# EAGLE board elasticNode (EAGLE 9.4.2), part 1 of 2
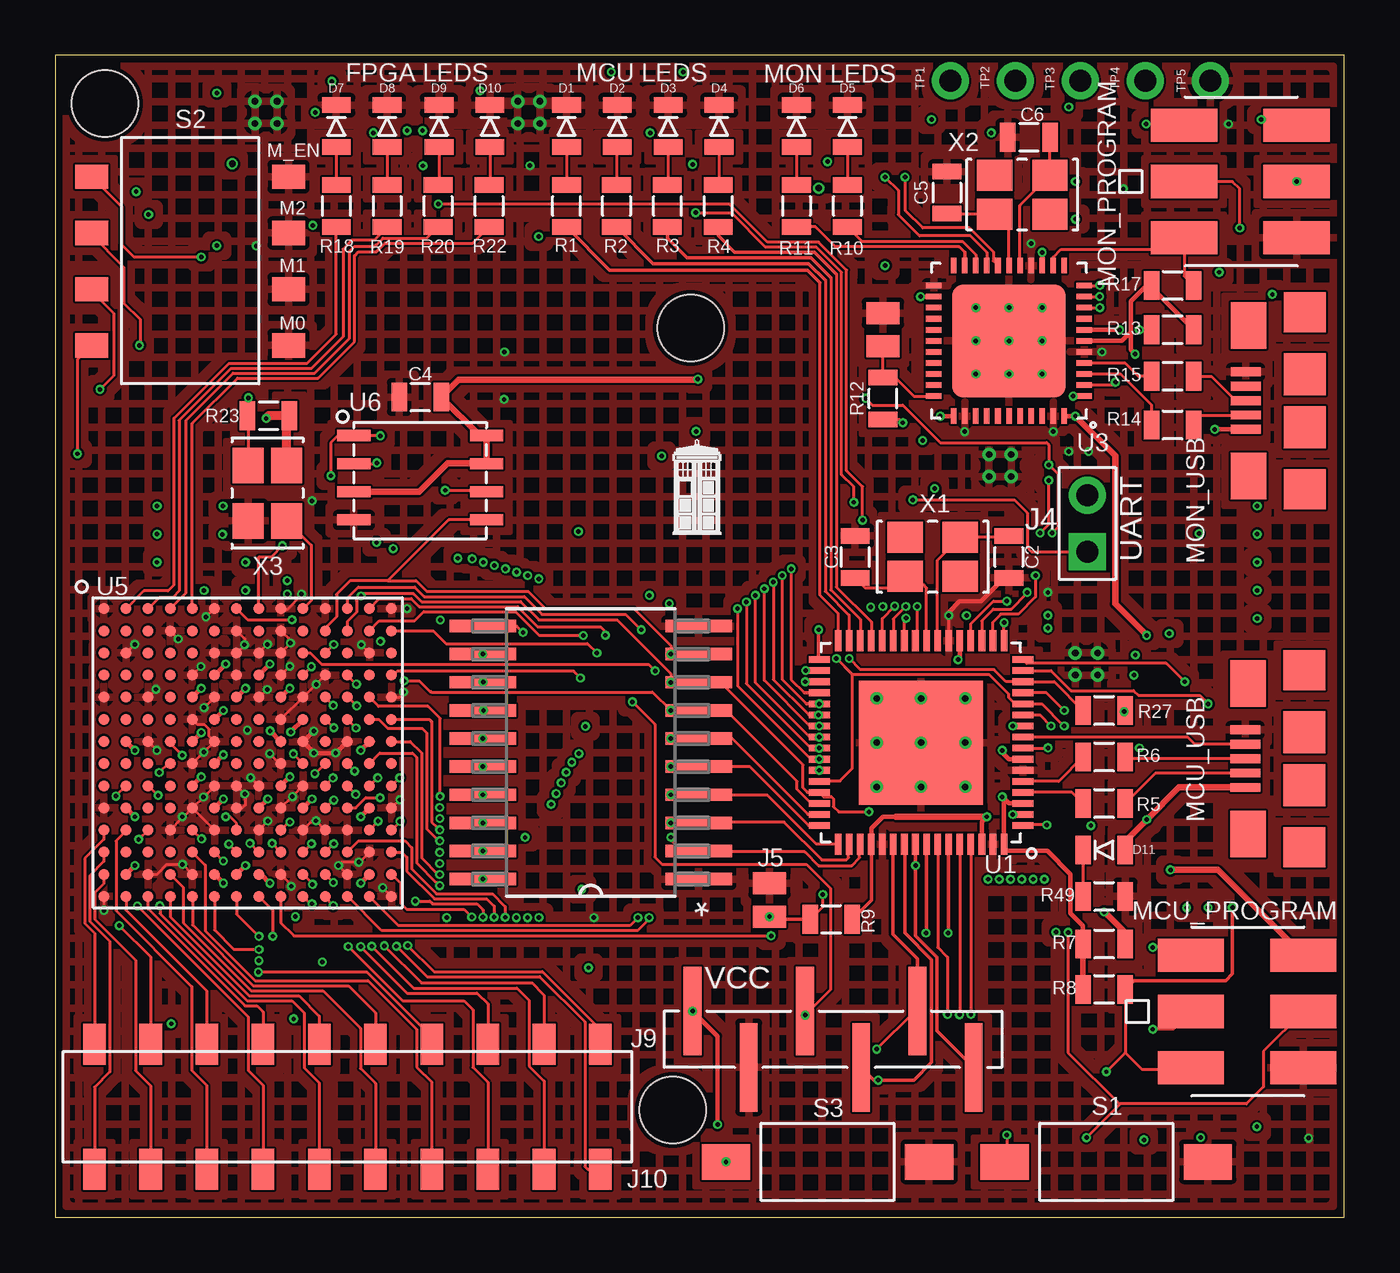
[diagram p0: board, top side]
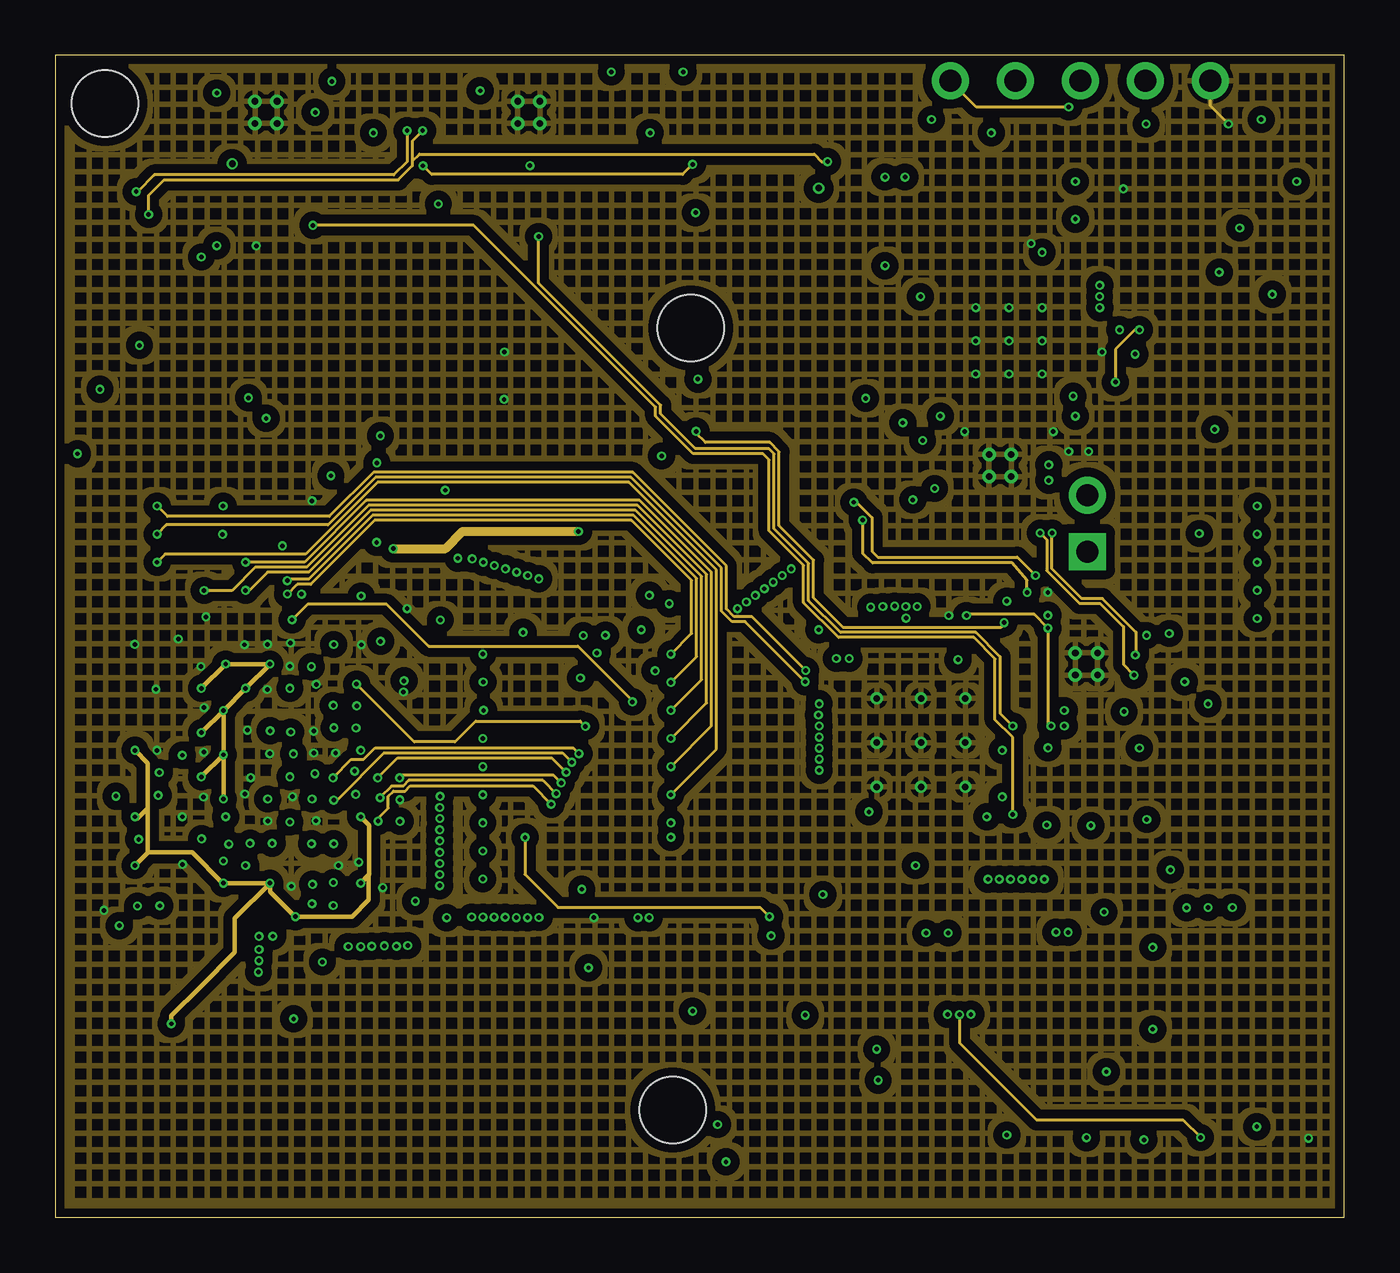
[diagram p1: board, inner layer GroundPlane]
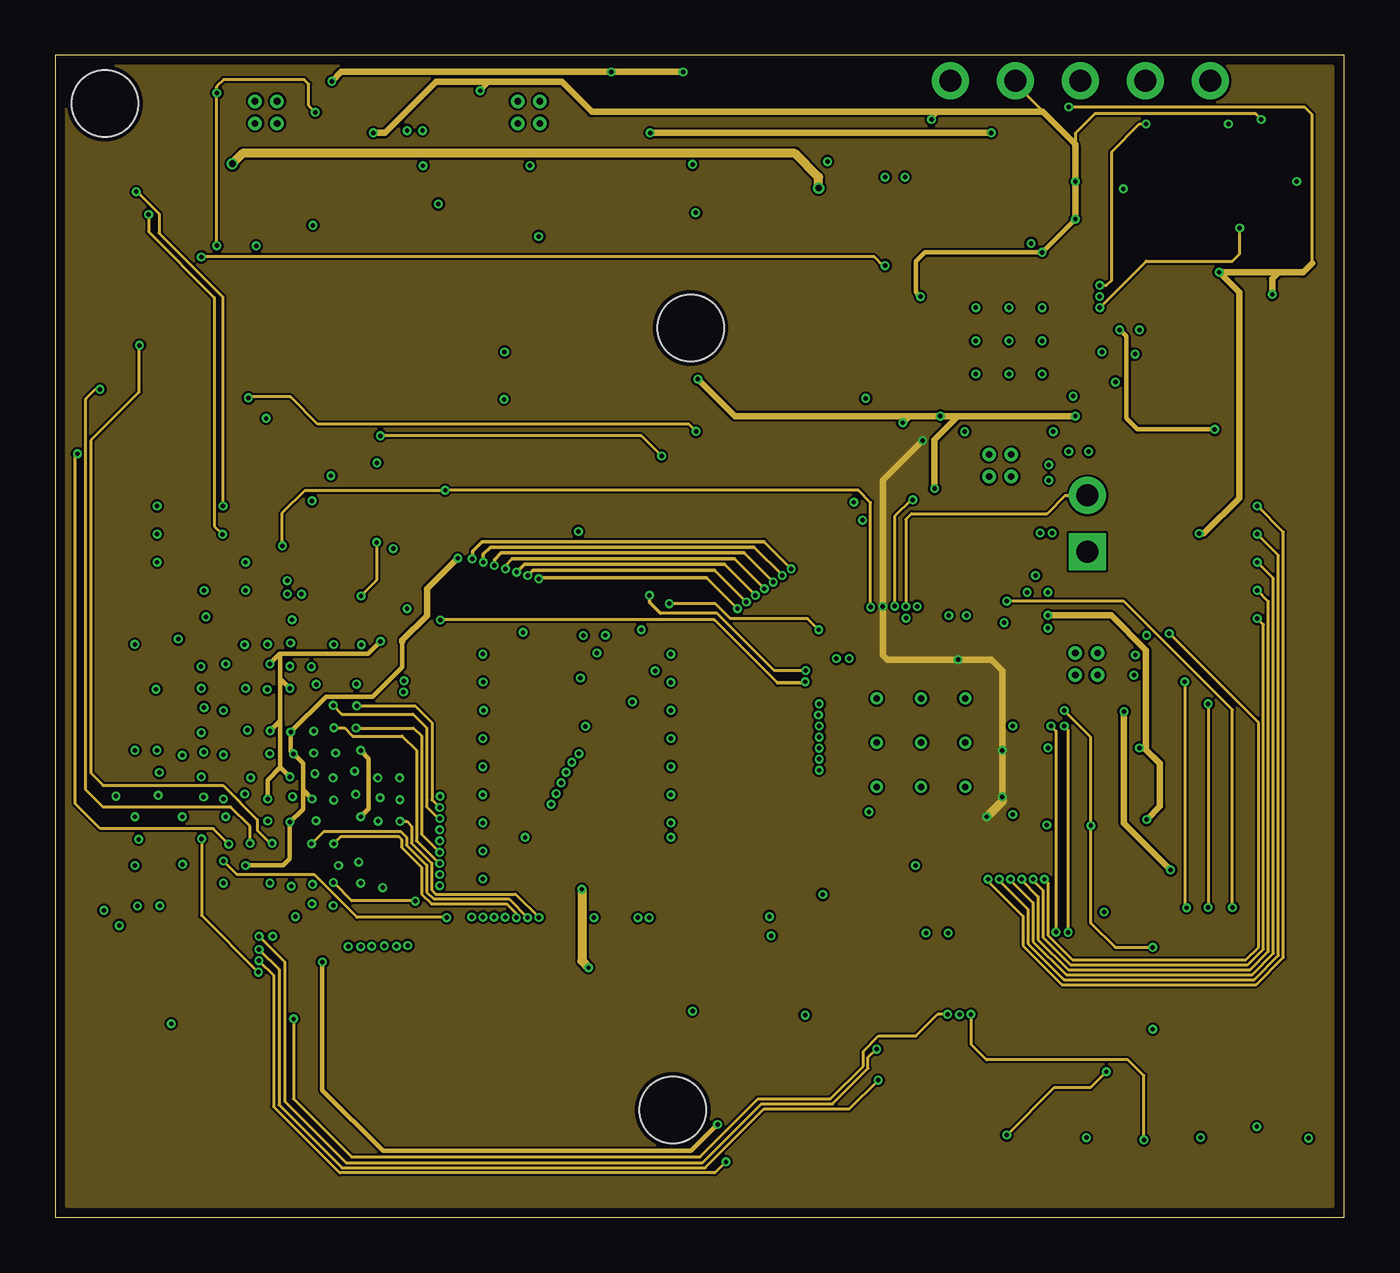
[diagram p2: board, inner layer PowerPlane]
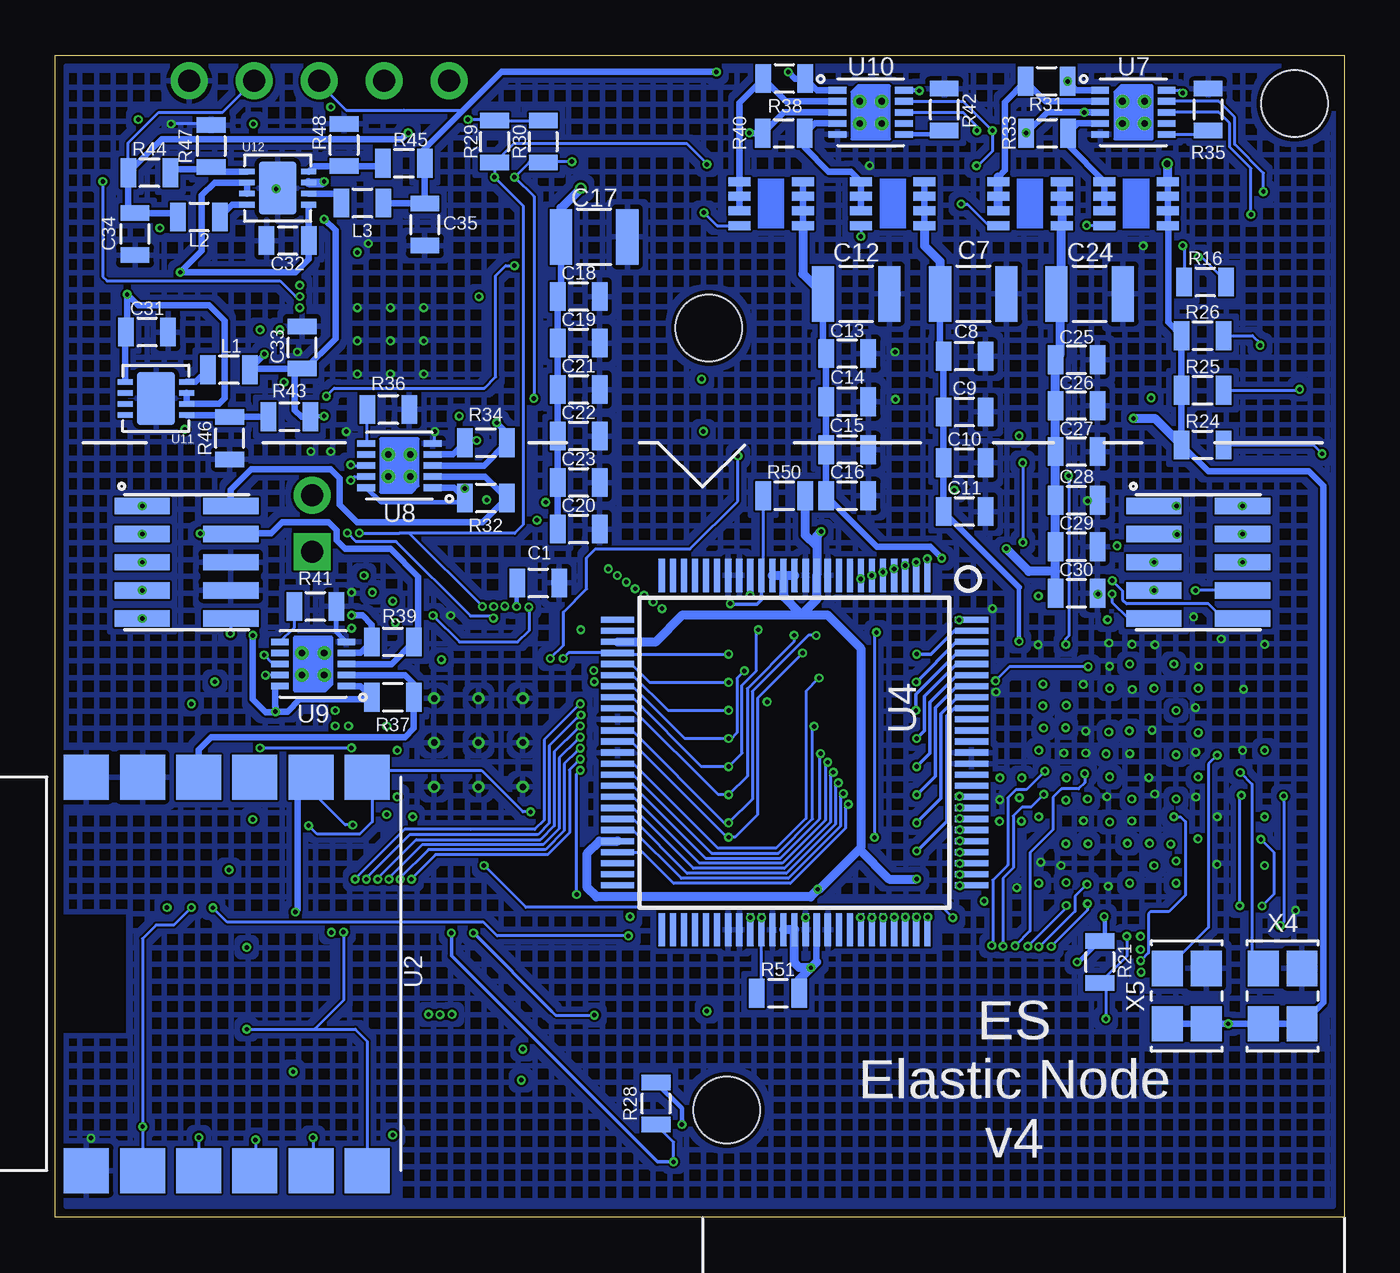
[diagram p3: board, bottom side, seen from below]

Size 58.25 x 52.5 mm. Coordinates in mm from the lower left corner, seen from the top.
Outline: 0,0 58.25,0 58.25,52.5 0,52.5 0,0
Copper layers (1+2*3+16): Top 0.018mm / dielectric 0.36mm / GroundPlane 0.035mm / dielectric 0.71mm / PowerPlane 0.035mm / dielectric 0.36mm / Bottom 0.018mm
Design rules "Multi-CB_4L_100Êm-Tracks_OL35Êm-IL35Êm": minimum track width 0.1mm, minimum drill 0.2mm, track to track 0.1mm, track to pad 0.1mm, pad to pad 0.1mm, via to via 0.1mm, smd to smd 0mil, copper to edge 0.2mm, drill to drill 0.2mm, minimum pad ring 0.125mm, minimum via ring 0.1mm, stop-mask expansion 2mil, vias tented up to drill 0.45mm, thermal gap 0.2mm
Holes 3 mm at 28.71,40.18 27.91,4.85 2.24,50.32

## Footprints (pad centres in the part's own frame; a part is rotated, then mirrored left to right if it is on the bottom)
0805 = smd 0.7 x 1.3: 1 -0.95,0; 2 0.95,0
1210 = smd 1 x 2.5: 1 -1.5,0; 2 1.5,0
5X2_HEADER_SMT_1.27 = smd 0.74 x 2.5: 1 -2.54,-2; 2 -1.27,-2; 3 0,-2; 4 1.27,-2; 5 2.54,-2; 6 2.54,2; 7 1.27,2; 8 0,2; 9 -1.27,2; 10 -2.54,2
ICSP_SMT = smd 1.5 x 3: 1 -2.54,-2.58; 2 -2.54,2.5; 3 0,-2.58; 4 0,2.5; 5 2.54,-2.58; 6 2.54,2.5
2X1_HEADER = drill 1 pad 1.676 square: 1 0,1.27 | drill 1 pad 1.676: 3 0,-1.27
JUMPER_SMT = smd 1 x 1.5: 1 -0.75,0; 2 0.75,0
USB_MICRO_B_SMT = smd 0.4 x 1.35: 1 -1.3,0; 2 -0.65,0; 3 0,0; 4 0.65,0; 5 1.3,0 | smd 2.1 x 1.6: CASE_1 -3.4,-0.125; CASE_2 3.4,-0.125 | smd 1.8 x 1.9: CASE_3 -4,-2.675; CASE_6 4,-2.675 | smd 1.9 x 1.9: CASE_4 -1.2,-2.675; CASE_5 1.2,-2.675
6X1_JTAG = smd 0.8 x 4: 1 -6.35,1.27; 2 -3.81,-1.27; 3 -1.27,1.27; 4 1.27,-1.27; 5 3.81,1.27; 6 6.35,-1.27
10X2_HEADER_SMT = smd 1.85 x 1.02: 1 2.825,11.43; 2 2.825,8.89; 3 2.825,6.35; 4 2.825,3.81; 5 2.825,1.27; 6 2.825,-1.27; 7 2.825,-3.81; 8 2.825,-6.35; 9 2.825,-8.89; 10 2.825,-11.43; 11 -2.825,-11.43; 12 -2.825,-8.89; 13 -2.825,-6.35; 14 -2.825,-3.81; 15 -2.825,-1.27; 16 -2.825,1.27; 17 -2.825,3.81; 18 -2.825,6.35; 19 -2.825,8.89; 20 -2.825,11.43
POWERPAK1212-8 = smd 0.405 x 0.99: 1 -0.99,-1.435; 2 -0.33,-1.435; 3 0.33,-1.435; 4 0.99,-1.435; 5 0.99,1.435; 6 0.33,1.435; 7 -0.33,1.435; 8 -0.99,1.435
SPST_2PIN_SMT = smd 2.18 x 1.6: 1 -4.59,0; 2 4.59,0
SPST_DIP4_SMT = smd 1.1 x 1.5: 1 -3.83,4.45; 2 -1.29,4.45; 3 1.25,4.45; 4 3.79,4.45; 5 3.79,-4.45; 6 1.25,-4.45; 7 -1.29,-4.45; 8 -3.83,-4.45
THT = drill 1 pad 1.676: 3 0,0
QFN64 = smd 0.95 x 0.3: 1 -4.6,3.75; 2 -4.6,3.25; 3 -4.6,2.75; 4 -4.6,2.25; 5 -4.6,1.75; 6 -4.6,1.25; 7 -4.6,0.75; 8 -4.6,0.25; 9 -4.6,-0.25; 10 -4.6,-0.75; 11 -4.6,-1.25; 12 -4.6,-1.75; 13 -4.6,-2.25; 14 -4.6,-2.75; 15 -4.6,-3.25; 16 -4.6,-3.75; 33 4.6,-3.75; 34 4.6,-3.25; 35 4.6,-2.75; 36 4.6,-2.25; 37 4.6,-1.75; 38 4.6,-1.25; 39 4.6,-0.75; 40 4.6,-0.25; 41 4.6,0.25; 42 4.6,0.75; 43 4.6,1.25; 44 4.6,1.75; 45 4.6,2.25; 46 4.6,2.75; 47 4.6,3.25; 48 4.6,3.75 | smd 0.3 x 0.95: 17 -3.75,-4.6; 18 -3.25,-4.6; 19 -2.75,-4.6; 20 -2.25,-4.6; 21 -1.75,-4.6; 22 -1.25,-4.6; 23 -0.75,-4.6; 24 -0.25,-4.6; 25 0.25,-4.6; 26 0.75,-4.6; 27 1.25,-4.6; 28 1.75,-4.6; 29 2.25,-4.6; 30 2.75,-4.6; 31 3.25,-4.6; 32 3.75,-4.6; 49 3.75,4.6; 50 3.25,4.6; 51 2.75,4.6; 52 2.25,4.6; 53 1.75,4.6; 54 1.25,4.6; 55 0.75,4.6; 56 0.25,4.6; 57 -0.25,4.6; 58 -0.75,4.6; 59 -1.25,4.6; 60 -1.75,4.6; 61 -2.25,4.6; 62 -2.75,4.6; 63 -3.25,4.6; 64 -3.75,4.6 | smd 5.6 x 5.6: PAD 0,0 | drill 0.3: VIA1 -2,2; VIA2 0,2; VIA3 2,2; VIA4 -2,0; VIA5 0,0; VIA6 2,0; VIA7 -2,-2; VIA8 0,-2; VIA9 2,-2
MRF24J40MA = smd 2.032 x 2.032: 1 -8.89,6.35; 2 -8.89,3.81; 3 -8.89,1.27; 4 -8.89,-1.27; 5 -8.89,-3.81; 6 -8.89,-6.35; 7 8.89,-6.35; 8 8.89,-3.81; 9 8.89,-1.27; 10 8.89,1.27; 11 8.89,3.81; 12 8.89,6.35
QFN44 = smd 0.7 x 0.25: 1 -3.4,2.5; 2 -3.4,2; 3 -3.4,1.5; 4 -3.4,1; 5 -3.4,0.5; 6 -3.4,0; 7 -3.4,-0.5; 8 -3.4,-1; 9 -3.4,-1.5; 10 -3.4,-2; 11 -3.4,-2.5; 23 3.4,-2.5; 24 3.4,-2; 25 3.4,-1.5; 26 3.4,-1; 27 3.4,-0.5; 28 3.4,0; 29 3.4,0.5; 30 3.4,1; 31 3.4,1.5; 32 3.4,2; 33 3.4,2.5 | smd 0.25 x 0.7: 12 -2.5,-3.4; 13 -2,-3.4; 14 -1.5,-3.4; 15 -1,-3.4; 16 -0.5,-3.4; 17 0,-3.4; 18 0.5,-3.4; 19 1,-3.4; 20 1.5,-3.4; 21 2,-3.4; 22 2.5,-3.4; 34 2.5,3.4; 35 2,3.4; 36 1.5,3.4; 37 1,3.4; 38 0.5,3.4; 39 0,3.4; 40 -0.5,3.4; 41 -1,3.4; 42 -1.5,3.4; 43 -2,3.4; 44 -2.5,3.4 | smd 5.12 x 5.12: 45 0,0
TQFP100 = smd 1.5 x 0.28: 1 -8,6; 2 -8,5.5; 3 -8,5; 4 -8,4.5; 5 -8,4; 6 -8,3.5; 7 -8,3; 8 -8,2.5; 9 -8,2; 10 -8,1.5; 11 -8,1; 12 -8,0.5; 13 -8,0; 14 -8,-0.5; 15 -8,-1; 16 -8,-1.5; 17 -8,-2; 18 -8,-2.5; 19 -8,-3; 20 -8,-3.5; 21 -8,-4; 22 -8,-4.5; 23 -8,-5; 24 -8,-5.5; 25 -8,-6; 51 8,-6; 52 8,-5.5; 53 8,-5; 54 8,-4.5; 55 8,-4; 56 8,-3.5; 57 8,-3; 58 8,-2.5; 59 8,-2; 60 8,-1.5; 61 8,-1; 62 8,-0.5; 63 8,0; 64 8,0.5; 65 8,1; 66 8,1.5; 67 8,2; 68 8,2.5; 69 8,3; 70 8,3.5; 71 8,4; 72 8,4.5; 73 8,5; 74 8,5.5; 75 8,6 | smd 0.28 x 1.5: 26 -6,-8; 27 -5.5,-8; 28 -5,-8; 29 -4.5,-8; 30 -4,-8; 31 -3.5,-8; 32 -3,-8; 33 -2.5,-8; 34 -2,-8; 35 -1.5,-8; 36 -1,-8; 37 -0.5,-8; 38 0,-8; 39 0.5,-8; 40 1,-8; 41 1.5,-8; 42 2,-8; 43 2.5,-8; 44 3,-8; 45 3.5,-8; 46 4,-8; 47 4.5,-8; 48 5,-8; 49 5.5,-8; 50 6,-8; 76 6,8; 77 5.5,8; 78 5,8; 79 4.5,8; 80 4,8; 81 3.5,8; 82 3,8; 83 2.5,8; 84 2,8; 85 1.5,8; 86 1,8; 87 0.5,8; 88 0,8; 89 -0.5,8; 90 -1,8; 91 -1.5,8; 92 -2,8; 93 -2.5,8; 94 -3,8; 95 -3.5,8; 96 -4,8; 97 -4.5,8; 98 -5,8; 99 -5.5,8; 100 -6,8
FTGB196 = smd 0.5 x 0.5: A1 -6.5,6.5; A2 -5.5,6.5; A3 -4.5,6.5; A4 -3.5,6.5; A5 -2.5,6.5; A6 -1.5,6.5; A7 -0.5,6.5; A8 0.5,6.5; A9 1.5,6.5; A10 2.5,6.5; A11 3.5,6.5; A12 4.5,6.5; A13 5.5,6.5; A14 6.5,6.5; B1 -6.5,5.5; B2 -5.5,5.5; B3 -4.5,5.5; B4 -3.5,5.5; B5 -2.5,5.5; B6 -1.5,5.5; B7 -0.5,5.5; B8 0.5,5.5; B9 1.5,5.5; B10 2.5,5.5; B11 3.5,5.5; B12 4.5,5.5; B13 5.5,5.5; B14 6.5,5.5; C1 -6.5,4.5; C2 -5.5,4.5; C3 -4.5,4.5; C4 -3.5,4.5; C5 -2.5,4.5; C6 -1.5,4.5; C7 -0.5,4.5; C8 0.5,4.5; C9 1.5,4.5; C10 2.5,4.5; C11 3.5,4.5; C12 4.5,4.5; C13 5.5,4.5; C14 6.5,4.5; D1 -6.5,3.5; D2 -5.5,3.5; D3 -4.5,3.5; D4 -3.5,3.5; D5 -2.5,3.5; D6 -1.5,3.5; D7 -0.5,3.5; D8 0.5,3.5; D9 1.5,3.5; D10 2.5,3.5; D11 3.5,3.5; D12 4.5,3.5; D13 5.5,3.5; D14 6.5,3.5; E1 -6.5,2.5; E2 -5.5,2.5; E3 -4.5,2.5; E4 -3.5,2.5; E5 -2.5,2.5; E6 -1.5,2.5; E7 -0.5,2.5; E8 0.5,2.5; E9 1.5,2.5; E10 2.5,2.5; E11 3.5,2.5; E12 4.5,2.5; E13 5.5,2.5; E14 6.5,2.5; F1 -6.5,1.5; F2 -5.5,1.5; F3 -4.5,1.5; F4 -3.5,1.5; F5 -2.5,1.5; F6 -1.5,1.5; F7 -0.5,1.5; F8 0.5,1.5; F9 1.5,1.5; F10 2.5,1.5; F11 3.5,1.5; F12 4.5,1.5; F13 5.5,1.5; F14 6.5,1.5; G1 -6.5,0.5; G2 -5.5,0.5; G3 -4.5,0.5; G4 -3.5,0.5; G5 -2.5,0.5; G6 -1.5,0.5; G7 -0.5,0.5; G8 0.5,0.5; G9 1.5,0.5; G10 2.5,0.5; G11 3.5,0.5; G12 4.5,0.5; G13 5.5,0.5; G14 6.5,0.5; H1 -6.5,-0.5; H2 -5.5,-0.5; H3 -4.5,-0.5; H4 -3.5,-0.5; H5 -2.5,-0.5; H6 -1.5,-0.5; H7 -0.5,-0.5; H8 0.5,-0.5; H9 1.5,-0.5; H10 2.5,-0.5; H11 3.5,-0.5; H12 4.5,-0.5; H13 5.5,-0.5; H14 6.5,-0.5; J1 -6.5,-1.5; J2 -5.5,-1.5; J3 -4.5,-1.5; J4 -3.5,-1.5; J5 -2.5,-1.5; J6 -1.5,-1.5; J7 -0.5,-1.5; J8 0.5,-1.5; J9 1.5,-1.5; J10 2.5,-1.5; J11 3.5,-1.5; J12 4.5,-1.5; J13 5.5,-1.5; J14 6.5,-1.5; K1 -6.5,-2.5; K2 -5.5,-2.5; K3 -4.5,-2.5; K4 -3.5,-2.5; K5 -2.5,-2.5; K6 -1.5,-2.5; K7 -0.5,-2.5; K8 0.5,-2.5; K9 1.5,-2.5; K10 2.5,-2.5; K11 3.5,-2.5; K12 4.5,-2.5; K13 5.5,-2.5; K14 6.5,-2.5; L1 -6.5,-3.5; L2 -5.5,-3.5; L3 -4.5,-3.5; L4 -3.5,-3.5; L5 -2.5,-3.5; L6 -1.5,-3.5; L7 -0.5,-3.5; L8 0.5,-3.5; L9 1.5,-3.5; L10 2.5,-3.5; L11 3.5,-3.5; L12 4.5,-3.5; L13 5.5,-3.5; L14 6.5,-3.5; M1 -6.5,-4.5; M2 -5.5,-4.5; M3 -4.5,-4.5; M4 -3.5,-4.5; M5 -2.5,-4.5; M6 -1.5,-4.5; M7 -0.5,-4.5; M8 0.5,-4.5; M9 1.5,-4.5; M10 2.5,-4.5; M11 3.5,-4.5; M12 4.5,-4.5; M13 5.5,-4.5; M14 6.5,-4.5; N1 -6.5,-5.5; N2 -5.5,-5.5; N3 -4.5,-5.5; N4 -3.5,-5.5; N5 -2.5,-5.5; N6 -1.5,-5.5; N7 -0.5,-5.5; N8 0.5,-5.5; N9 1.5,-5.5; N10 2.5,-5.5; N11 3.5,-5.5; N12 4.5,-5.5; N13 5.5,-5.5; N14 6.5,-5.5; P1 -6.5,-6.5; P2 -5.5,-6.5; P3 -4.5,-6.5; P4 -3.5,-6.5; P5 -2.5,-6.5; P6 -1.5,-6.5; P7 -0.5,-6.5; P8 0.5,-6.5; P9 1.5,-6.5; P10 2.5,-6.5; P11 3.5,-6.5; P12 4.5,-6.5; P13 5.5,-6.5; P14 6.5,-6.5
WDFN8 = smd 1.5 x 0.5: 1 -3,1.905; 2 -3,0.635; 3 -3,-0.635; 4 -3,-1.905; 5 3,-1.905; 6 3,-0.635; 7 3,0.635; 8 3,1.905
VDFN10 = smd 0.8 x 0.3: 1 -1.5,1; 2 -1.5,0.5; 3 -1.5,0; 4 -1.5,-0.5; 5 -1.5,-1; 6 1.5,-1; 7 1.5,-0.5; 8 1.5,0; 9 1.5,0.5; 10 1.5,1 | drill 0.3 pad 0.61: P$1 -0.5,0.5; P$2 0.5,0.5; P$3 0.5,-0.5; P$4 -0.5,-0.5
DFN8 = smd 0.25 x 0.68: 1 -0.75,-1.39; 2 -0.25,-1.39; 3 0.25,-1.39; 4 0.75,-1.39; 5 0.75,1.39; 6 0.25,1.39; 7 -0.25,1.39; 8 -0.75,1.39 | smd 2.4 x 1.7: 9 0,0
SOIC20 = smd 3 x 0.559: 1 -4.878,5.715; 2 -4.878,4.445; 3 -4.878,3.175; 4 -4.878,1.905; 5 -4.878,0.635; 6 -4.878,-0.635; 7 -4.878,-1.905; 8 -4.878,-3.175; 9 -4.878,-4.445; 10 -4.878,-5.715; 11 4.878,-5.715; 12 4.878,-4.445; 13 4.878,-3.175; 14 4.878,-1.905; 15 4.878,-0.635; 16 4.878,0.635; 17 4.878,1.905; 18 4.878,3.175; 19 4.878,4.445; 20 4.878,5.715
3.2X2.5_OSC = smd 1.6 x 1.4: 1 -1.25,-0.875; 2 1.25,-0.875; 3 1.25,0.875; 4 -1.25,0.875

## Placement (x,y rotation side)
C1  10u  [0805]  36.42,28.66 0 bottom
C2  20p  [0805]  43.1,29.84 270 top
C3  20p  [0805]  36.15,29.84 90 top
C4  10u  [0805]  16.49,37.06 180 top
C5  20p  [0805]  40.3,46.3 90 top
C6  20p  [0805]  44,48.8 180 top
C7  100u  [1210]  16.76,41.73 0 bottom
C8  4.7u  [0805]  17.16,38.91 0 bottom
C9  4.7u  [0805]  17.16,36.39 0 bottom
C10  0.47u  [0805]  17.16,34.09 0 bottom
C11  0.47u  [0805]  17.16,31.89 0 bottom
C12  47u  [1210]  22.06,41.73 0 bottom
C13  4.7u  [0805]  22.46,39.02 0 bottom
C14  0.47u  [0805]  22.46,36.85 0 bottom
C15  0.47u  [0805]  22.46,34.69 0 bottom
C16  0.47u  [0805]  22.46,32.6 0 bottom
C17  100u  [1210]  33.9,44.3 0 bottom
C18  4.7u  [0805]  34.6,41.6 0 bottom
C19  4.7u  [0805]  34.6,39.5 0 bottom
C20  4.7u  [0805]  34.6,31.1 0 bottom
C21  0.47u  [0805]  34.6,37.4 0 bottom
C22  0.47u  [0805]  34.6,35.3 0 bottom
C23  0.47u  [0805]  34.6,33.2 0 bottom
C24  100u  [1210]  11.5,41.73 0 bottom
C25  4.7u  [0805]  12.1,38.75 0 bottom
C26  4.7u  [0805]  12.1,36.67 0 bottom
C27  4.7u  [0805]  12.1,34.6 0 bottom
C28  0.47u  [0805]  12.1,32.4 0 bottom
C29  0.47u  [0805]  12.1,30.3 0 bottom
C30  0.47u  [0805]  12.1,28.2 0 bottom
C31  10u  [0805]  54.1,40 0 bottom
C32  10u  [0805]  47.75,44.13 180 bottom
C33  22u  [0805]  47.1,39.3 90 bottom
C34  22u  [0805]  54.65,44.42 270 bottom
C35  22u  [0805]  41.55,44.85 90 bottom
D1  GREEN 2.2V  [0805]  23.1,49.3 90 top
D2  GREEN 2.2V  [0805]  25.4,49.3 90 top
D3  GREEN 2.2V  [0805]  27.7,49.3 90 top
D4  GREEN 2.2V  [0805]  30,49.3 90 top
D5  GREEN 2.2V  [0805]  35.8,49.3 90 top
D6  GREEN 2.2V  [0805]  33.5,49.3 90 top
D7  RED 1.8V 2mA  [0805]  12.7,49.3 90 top
D8  RED  [0805]  15,49.3 90 top
D9  RED  [0805]  17.34,49.3 90 top
D10  RED  [0805]  19.64,49.3 90 top
D11  RED  [0805]  47.4,16.6 180 top
J1  FEMALE_HEADER_5X2  [5X2_HEADER_SMT_1.27]  6.6,29.6 270 bottom
J2  FEMALE_HEADER_5X2  [5X2_HEADER_SMT_1.27]  52.32,29.6 270 bottom
J3  ISP_CONN_6PIN  [ICSP_SMT]  53.9,9.3 270 top
J4  FEMALE_HEADER_2X1  [2X1_HEADER]  46.65,31.35 180 top
J5  JUMPER  [JUMPER_SMT]  32.27,14.34 90 top
J6  ISP_CONN_6PIN  [ICSP_SMT]  53.6,46.8 270 top
J7  JUMPER  [JUMPER_SMT]  37.4,40.1 90 top
J8  USB_CONNMICRO_SMT  [USB_MICRO_B_SMT]  53.8,36.9 90 top
J9  JTAG_CONN_6PINSMT  [6X1_JTAG]  35.15,8.05 0 top
J10  FEMALE_HEADER_10X2  [10X2_HEADER_SMT]  13.2,5 270 top
J11  USB_CONNMICRO_SMT  [USB_MICRO_B_SMT]  53.77,20.73 90 top
L1  3.3uH  [0805]  50.4,38.3 180 bottom
L2  3.3uH  [0805]  51.75,45.2 180 bottom
L3  3.3uH  [0805]  44.38,45.83 180 bottom
M1  SISS23DN  [POWERPAK1212-8]  20.4,45.8 270 bottom
M2  SISS23DN  [POWERPAK1212-8]  25.9,45.8 270 bottom
M3  SISS23DN  [POWERPAK1212-8]  9.4,45.8 270 bottom
M4  SISS23DN  [POWERPAK1212-8]  14.2,45.8 270 bottom
R1  550  [0805]  23.1,45.7 90 top
R2  550  [0805]  25.36,45.7 90 top
R3  550  [0805]  27.66,45.7 90 top
R4  550  [0805]  29.96,45.7 90 top
R5  22  [0805]  47.4,18.7 180 top
R6  22  [0805]  47.4,20.8 180 top
R7  2.4k  [0805]  47.4,12.35 0 top
R8  15k  [0805]  47.4,10.3 180 top
R9  10k  [0805]  35.07,13.46 180 top
R10  550  [0805]  35.8,45.7 90 top
R11  550  [0805]  33.5,45.7 90 top
R12  15k  [0805]  37.4,37 90 top
R13  0  [0805]  50.5,40.1 0 top
R14  22  [0805]  50.5,35.8 0 top
R15  22  [0805]  50.5,38 0 top
R16  2.4k  [0805]  6.28,42.26 0 bottom
R17  15k  [0805]  50.5,42.1 0 top
R18  750  [0805]  12.7,45.7 90 top
R19  750  [0805]  15,45.7 90 top
R20  750  [0805]  17.3,45.7 90 top
R21  4.7k  [0805]  11.04,11.54 90 bottom
R22  750  [0805]  19.6,45.7 90 top
R23  15k  [0805]  9.64,36.22 0 top
R24  2.4k  [0805]  6.4,34.9 0 bottom
R25  2.4k  [0805]  6.4,37.37 0 bottom
R26  2.4k  [0805]  6.4,39.83 0 bottom
R27  2.4k  [0805]  47.4,22.9 180 top
R28  15k  [0805]  31.1,5.14 90 bottom
R29  1.5k  [0805]  38.4,48.6 90 bottom
R30  1.5k  [0805]  36.2,48.6 90 bottom
R31  0.8  [0805]  13.45,51.33 0 bottom
R32  .8  [0805]  38.8,32.5 180 bottom
R33  0.8  [0805]  13.43,48.98 180 bottom
R34  .8  [0805]  38.8,35 0 bottom
R35  100  [0805]  6.15,50.05 270 bottom
R36  2000  [0805]  43.2,36.5 180 bottom
R37  .8  [0805]  43,23.5 180 bottom
R38  .8  [0805]  25.3,51.45 0 bottom
R39  0.15  [0805]  43,26 0 bottom
R40  .8  [0805]  25.32,48.98 180 bottom
R41  750  [0805]  46.5,27.6 180 bottom
R42  300  [0805]  18.07,50.05 270 bottom
R43  6k8  [0805]  47.67,36.17 0 bottom
R44  10k  [0805]  54,47.2 180 bottom
R45  20k  [0805]  42.5,47.62 180 bottom
R46  1k5  [0805]  50.38,35.2 270 bottom
R47  15k  [0805]  51.2,48.4 90 bottom
R48  10k  [0805]  45.2,48.45 270 bottom
R49  270  [0805]  47.4,14.5 180 top
R50  10k  [0805]  25.31,32.6 0 bottom
R51  10k  [0805]  25.59,10.13 0 bottom
S1  SPST_BUTTON2PIN_SMT  [SPST_2PIN_SMT]  47.5,2.51 180 top
S2  SPST_DIP_4  [SPST_DIP4_SMT]  6.09,43.23 90 top
S3  SPST_BUTTON2PIN_SMT  [SPST_2PIN_SMT]  34.9,2.51 180 top
TP1  TEST_POINTTHT  [THT]  40.45,51.35 270 top
TP2  TEST_POINTTHT  [THT]  43.39,51.35 270 top
TP3  TEST_POINTTHT  [THT]  46.33,51.35 270 top
TP4  TEST_POINTTHT  [THT]  49.26,51.35 270 top
TP5  TEST_POINTTHT  [THT]  52.2,51.35 270 top
U1  AT90USB128  [QFN64]  39.12,21.45 180 top
U2  MRF24J40MA  [MRF24J40MA]  50.5,11 90 bottom
U3  ATMEGA32U4QFN  [QFN44]  43.1,39.6 180 top
U4  IDT7028L15-TQFP100  [TQFP100]  24.84,21 270 bottom
U5  SPARTAN7-LX15  [FTGB196]  8.7,21 0 top
U6  SST26VF032BWDFN  [WDFN8]  16.49,33.42 0 top
U7  PAC1720  [VDFN10]  9.53,49.92 0 bottom
U8  PAC1720  [VDFN10]  42.7,33.97 180 bottom
U9  PAC1720  [VDFN10]  46.6,25 180 bottom
U10  PAC1720  [VDFN10]  21.4,49.92 0 bottom
U11  LTC3419DFN  [DFN8]  53.7,37 90 bottom
U12  LTC3419DFN  [DFN8]  48.2,46.5 270 bottom
U13  74AHC573  [SOIC20]  24.2,21 180 top
X1  8MHz  [3.2X2.5_OSC]  39.65,29.84 180 top
X2  8MHz  [3.2X2.5_OSC]  43.7,46.2 180 top
X3  100MHz  [3.2X2.5_OSC]  9.59,32.72 270 top
X4  50MHz  [3.2X2.5_OSC]  2.78,10 90 bottom
X5  32MHz  [3.2X2.5_OSC]  7.11,10 90 bottom

## Library data of the parts
C1-C35 L1-L3 R1-R51 X1-X5 = passive
D1-D11 = opto
J1 J2 J4-J11 S1-S3 TP1-TP5 = connectors
J3 = connectors; SPICEPREFIX: X
M1-M4 U11 U12 = power
U1 U3 U4 U6 U13 = ic
U2 = wireless
U5 = fpga
U7-U10 = sensors

## Nets
1V [power]: C34.1 L2.2 R40.2 R44.2 TP4.3 U10.3
1V8: C35.2 L3.1 R31.2 R38.2 R45.1 TP3.3 U7.1 U10.1
3V3 [power]: C4.1 C33.1 J3.2 J6.2 L1.1 R12.1 R13.2 R16.1 R17.1 R27.1 R29.2 R30.2 R32.2 R33.2 R34.2 R37.2 R43.2 TP2.3 U3.6 U3.14 U3.24 U3.34 U3.44 U6.3 U6.7 U6.8 U7.3 U7.10 U8.1 U8.3 U8.10 U9.1 U9.10 U10.10 U12.7
5V [power]: C31.1 C32.1 J2.9 R39.2 TP1.3 U9.3 U11.2 U11.3 U11.5 U12.2 U12.3 U12.5
DAUGHTER_VCC [power]: J2.10 R32.1 U8.2
EN_OSC_100 [power]: R23.1 U1.17 X3.1
FPGA_AUX_POWER: M2.4 U1.18
FPGA_DONE: U1.16 U5.P9
FPGA_GPIO_1: J10.1 U5.J12
FPGA_GPIO_2: J10.2 U5.P11
FPGA_GPIO_3: J10.3 U5.P10
FPGA_GPIO_4: J10.4 U5.M5
FPGA_GPIO_5: J10.5 U5.N4
FPGA_GPIO_6: J10.6 U5.J3
FPGA_GPIO_7: J10.7 U5.L3
FPGA_GPIO_8: J10.8 U5.L2
FPGA_GPIO_9: J10.9 U5.N1
FPGA_GPIO_10: J10.10 U5.M1
FPGA_GPIO_11: J10.11 U5.L1
FPGA_GPIO_12: J10.12 U5.J2
FPGA_GPIO_13: J10.13 U5.P2
FPGA_GPIO_14: J10.14 U5.P3
FPGA_GPIO_15: J10.15 U5.P4
FPGA_GPIO_16: J10.16 U5.P5
FPGA_GPIO_17: J10.17 U5.L5
FPGA_GPIO_18: J10.18 U5.N10
FPGA_GPIO_19: J10.19 U5.H11
FPGA_GPIO_20: J10.20 U5.H12
FPGA_INT_POWER: M1.4 U1.10
FPGA_IO_POWER: M3.4 U1.2
FPGA_LED0: R18.1 U5.A2
FPGA_LED1: R19.1 U5.A3
FPGA_LED2: R20.1 U5.A4
FPGA_LED3: R22.1 U5.A5
FPGA_RESET: R28.1 S3.2 U1.59 U5.L7
FPGA_VCCAUX [power]: C12.1 C13.1 C14.1 C15.1 C16.1 M2.5 M2.6 M2.7 M2.8 U5.F10 U5.H10 U5.K10 U5.L9 U5.N7
FPGA_VCCAUX_MON [power]: M2.1 M2.2 M2.3 R38.1 U10.2
FPGA_VCCINT [power]: C7.1 C8.1 C9.1 C10.1 C11.1 M1.5 M1.6 M1.7 M1.8 U5.D6 U5.D8 U5.E5 U5.E7 U5.E9 U5.F6 U5.G5 U5.G9 U5.H6 U5.J5 U5.J9 U5.K6 U5.K8
FPGA_VCCINT_MON [power]: M1.1 M1.2 M1.3 R40.1 U10.4
FPGA_VCCIO [power]: C17.1 C18.1 C19.1 C20.1 C21.1 C22.1 C23.1 J9.1 M3.5 M3.6 M3.7 M3.8 R21.2 R23.2 R24.1 R25.1 R26.1 R28.2 U5.G2 U5.G13 U5.K2 U5.K13 U5.N2 U5.N6 U5.N8 U5.N13 X3.4 X4.1 X4.4 X5.1 X5.4
FPGA_VCCIO_MON [power]: M3.1 M3.2 M3.3 R33.1 U7.4
GND: C1.2 C2.2 C3.2 C4.2 C5.2 C6.2 C7.2 C8.2 C9.2 C10.2 C11.2 C12.2 C13.2 C14.2 C15.2 C16.2 C17.2 C18.2 C19.2 C20.2 C21.2 C22.2 C23.2 C24.2 C25.2 C26.2 C27.2 C28.2 C29.2 C30.2 C31.2 C32.2 C33.2 C34.2 C35.1 D1.2 D2.2 D3.2 D4.2 D5.2 D6.2 D7.2 D8.2 D9.2 D10.2 J2.7 J2.8 J3.6 J5.2 J6.6 J7.2 J8.5 J9.2 J11.5 R35.1 R36.1 R41.1 R42.1 R46.2 R47.2 R48.1 R49.1 S1.1 S2.5 S2.6 S2.7 S2.8 S3.1 TP5.3 U1.6 U1.22 U1.53 U1.63 U1.PAD U1.VIA1 U1.VIA2 U1.VIA3 U1.VIA4 U1.VIA5 U1.VIA6 U1.VIA7 U1.VIA8 U1.VIA9 U2.1 U2.11 U2.12 U3.5 U3.15 U3.23 U3.35 U3.43 U3.45 U4.10 U4.12 U4.18 U4.19 U4.35 U4.38 U4.57 U4.58 U4.61 U4.64 U4.66 U4.87 U4.88 U5.A1 U5.A6 U5.A9 U5.A11 U5.A14 U5.B4 U5.B7 U5.B9 U5.C2 U5.C6 U5.C7 U5.C8 U5.C9 U5.C13 U5.D5 U5.D7 U5.D9 U5.D11 U5.E1 U5.E3 U5.E6 U5.E8 U5.E10 U5.E14 U5.F5 U5.F9 U5.G3 U5.G6 U5.G10 U5.G12 U5.H5 U5.H9 U5.J6 U5.J7 U5.J8 U5.J10 U5.K1 U5.K5 U5.K7 U5.K9 U5.K14 U5.L4 U5.L6 U5.L8 U5.L10 U5.L11 U5.L12 U5.M13 U5.N3 U5.N5 U5.N9 U5.N12 U5.P1 U5.P14 U6.4 U7.5 U7.P$1 U7.P$2 U7.P$3 U7.P$4 U8.5 U8.P$1 U8.P$2 U8.P$3 U8.P$4 U9.5 U9.P$1 U9.P$2 U9.P$3 U9.P$4 U10.5 U10.P$1 U10.P$2 U10.P$3 U10.P$4 U11.9 U12.9 U13.1 U13.10 X3.2 X4.2 X5.2
INIT_B: R21.1 U1.58 U5.P8
JTAG_TCK: J9.3 U1.57 U5.A7
JTAG_TDI: J9.5 U1.54 U5.P7
JTAG_TDO: J9.4 U1.55 U5.P6
JTAG_TMS: J9.6 U1.56 U5.M6
MCU_LED0: R1.1 U1.32
MCU_LED1: R2.1 U1.31
MCU_LED2: R3.1 U1.30
MCU_LED3: R4.1 U1.29
MCU_RESET: J3.5 R8.1 S1.2 U1.20
MCU_RX: J4.3 U1.27
MCU_TX: J4.1 U1.28
MCU_VCC [power]: C1.1 R7.1 R8.2 R9.1 R34.1 U1.3 U1.7 U1.21 U1.52 U1.62 U1.64 U8.4
MODE0: R24.2 S2.1 U5.M7
MODE1: R25.2 S2.2 U5.M8
MODE2: R26.2 S2.3 U5.M9
MON_HWB: J7.1 R12.2 U3.33
MON_LED0: R10.1 U3.20
MON_LED1: R11.1 U3.21
MON_MISO: J6.1 U3.11
MON_MOSI: J6.4 U3.10
MON_RESET: J6.5 R17.2 U3.13
MON_SCK: J6.3 U3.9
MON_USB_D+: R15.1 U3.4
MON_USB_D-: R14.1 U3.3
MON_USB_VCC [power]: J8.1 U3.7
MONITORING: R16.2 S2.4 U3.1
N$2: R44.1 R47.1 U12.1
N$3: R5.2 U1.4
N$4: C2.1 U1.23 X1.1
N$5: J8.3 R15.2
N$6: C3.1 U1.24 X1.3
N$7: R45.2 R48.2 U12.8
N$9: R42.2 U10.6
N$10: R6.2 U1.5
N$11: R41.2 U9.6
N$12: R35.2 U7.6
N$13: D4.1 R4.2
N$14: R36.2 U8.6
N$15: D3.1 R3.2
N$16: D6.1 R11.2
N$17: D5.1 R10.2
N$18: C5.1 U3.17 X2.3
N$19: J8.2 R14.2
N$20: C6.1 U3.16 X2.1
N$21: R13.1 U3.2
N$22: L2.1 U12.4
N$23: D2.1 R2.2
N$24: D1.1 R1.2
N$25: D10.1 R22.2
N$26: L3.2 U12.6
N$27: D9.1 R20.2
N$28: D11.2 R49.2
N$29: D8.1 R19.2
N$30: D7.1 R18.2
N$53: R43.1 R46.1 U11.1
N$55: L1.2 U11.4
OSC_32: U5.G4 X5.3
OSC_50: U5.H4 X4.3
OSC_100: U5.A10 X3.3
SCL: J1.1 R29.1 U1.25 U3.18 U7.9 U8.9 U9.9 U10.9
SDA: J1.2 R30.1 U1.26 U3.19 U7.8 U8.8 U9.8 U10.8
SELECTMAP_D0/SPI_MOSI/PDI/XMEGA_AD7: J1.5 J3.4 U1.12 U1.44 U2.5 U4.29 U5.B11 U6.5 U13.9
SELECTMAP_D1/SPI_MISO/MCU_PDO/XMEGA_AD6: J1.6 J3.1 U1.13 U1.45 U2.7 U4.30 U5.B12 U6.2 U13.8
SELECTMAP_D2/FPGA_WP/XMEGA_AD5: J1.4 U1.46 U4.31 U5.D10 U13.7
SELECTMAP_D3/FPGA_HOLD/XMEGA_AD4: J1.7 U1.47 U4.32 U5.C10 U13.6
SELECTMAP_D4/MCU_TX1/XMEGA_AD3: J1.3 U1.48 U4.33 U5.A12 U13.5
SELECTMAP_D5/MCU_RX1/XMEGA_AD2: J1.8 U1.49 U4.34 U5.A13 U13.4
SELECTMAP_D6/XMEGA_AD1: U1.50 U4.36 U5.B13 U13.3
SELECTMAP_D7/XMEGA_AD0: U1.51 U4.37 U5.B14 U13.2
SPI_CS: R27.2 U1.14 U5.C11 U6.1
SPI_SCK/CCLK: J3.3 U1.11 U2.6 U5.A8 U6.6
SRAM_POWER: M4.4 U1.19
SRAM_VDD: C24.1 C25.1 C26.1 C27.1 C28.1 C29.1 C30.1 M4.5 M4.6 M4.7 M4.8 R50.2 R51.2 U4.11 U4.13 U4.14 U4.15 U4.28 U4.46 U4.62 U4.63 U4.65 U13.20
SRAM_VDD_MON: M4.1 M4.2 M4.3 R31.1 U7.2
UID: J11.4 U1.9
USB_VCC_RAW [power]: D11.1 J11.1 R39.1 U1.8 U9.4
USBD+: J11.3 R6.1
USBD-: J11.2 R5.1
WIRELESS_CS: R7.2 U1.1 U2.8
WIRELESS_INT: U1.61 U2.4
WIRELESS_RESET: U1.15 U2.2
WIRELESS_VCC [power]: R37.1 U2.10 U9.2
WIRELESS_WAKE: U1.60 U2.3
XFPGA_A0: U4.84 U5.E13
XFPGA_A1: U4.83 U5.E12
XFPGA_A2: U4.82 U5.E11
XFPGA_A3: U4.81 U5.F14
XFPGA_A4: U4.80 U5.F13
XFPGA_A5: U4.79 U5.F12
XFPGA_A6: U4.78 U5.F11
XFPGA_A7: U4.77 U5.G14
XFPGA_A8: U4.76 U5.H13
XFPGA_A9: U4.75 U5.N14
XFPGA_A10: U4.74 U5.N11
XFPGA_A11: U4.73 U5.M14
XFPGA_A12: U4.72 U5.M12
XFPGA_A13: U4.71 U5.M11
XFPGA_A14: U4.70 U5.M10
XFPGA_A15: U4.69 U5.L14
XFPGA_D0: U4.39 U5.D14
XFPGA_D1: U4.40 U5.D12
XFPGA_D2: U4.41 U5.J11
XFPGA_D3: U4.42 U5.K11
XFPGA_D4: U4.43 U5.J13
XFPGA_D5: U4.44 U5.J14
XFPGA_D6: U4.45 U5.K12
XFPGA_D7: U4.47 U5.L13
XFPGA_RD: U4.59 U5.P12
XFPGA_WR: R51.1 U4.60 U5.P13
XMEGA_A0: U4.92 U13.19
XMEGA_A1: U4.93 U13.18
XMEGA_A2: U4.94 U13.17
XMEGA_A3: U4.95 U13.16
XMEGA_A4: U4.96 U13.15
XMEGA_A5: U4.97 U13.14
XMEGA_A6: U4.98 U13.13
XMEGA_A7: U4.99 U13.12
XMEGA_A8: J1.9 U1.35 U4.100
XMEGA_A9: U1.36 U4.1
XMEGA_A10: J2.6 U1.37 U4.2
XMEGA_A11: J2.5 U1.38 U4.3
XMEGA_A12: J2.4 U1.39 U4.4
XMEGA_A13: J2.3 U1.40 U4.5
XMEGA_A14: J2.2 U1.41 U4.6
XMEGA_A15: J2.1 U1.42 U4.7
XMEGA_RD: J1.10 U1.34 U4.17
XMEGA_WR: R50.1 U1.33 U4.16
XMEM_ALE/HWB: J5.1 R9.2 U1.43 U13.11